# Altium PCB Copy of ESP32_SENSORS_BATTERY_1.PcbDoc
Units mm, origin at the board's own origin, x right, y up, seen from the top; angles counter-clockwise.
Board outline 54 x 48.94 mm, 2 copper layers (Top Layer, Bottom Layer); 31 components, 23 nets, 129 pads, 0 vias.
Unrouted connection lines stored in the file: 71.
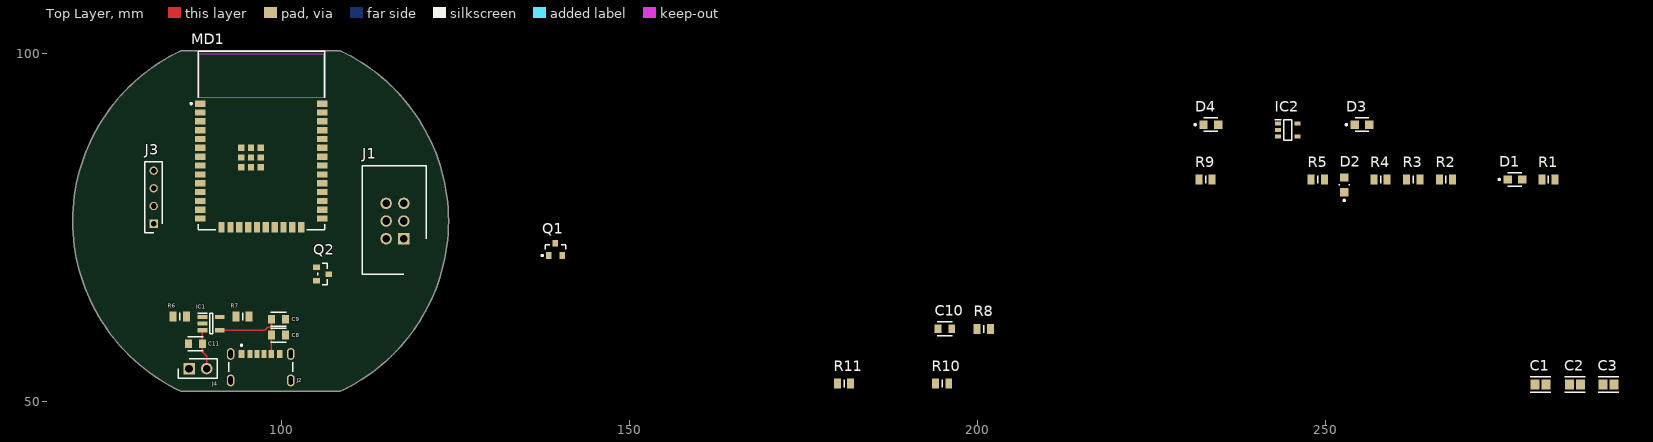
[diagram p0: Top Layer view]
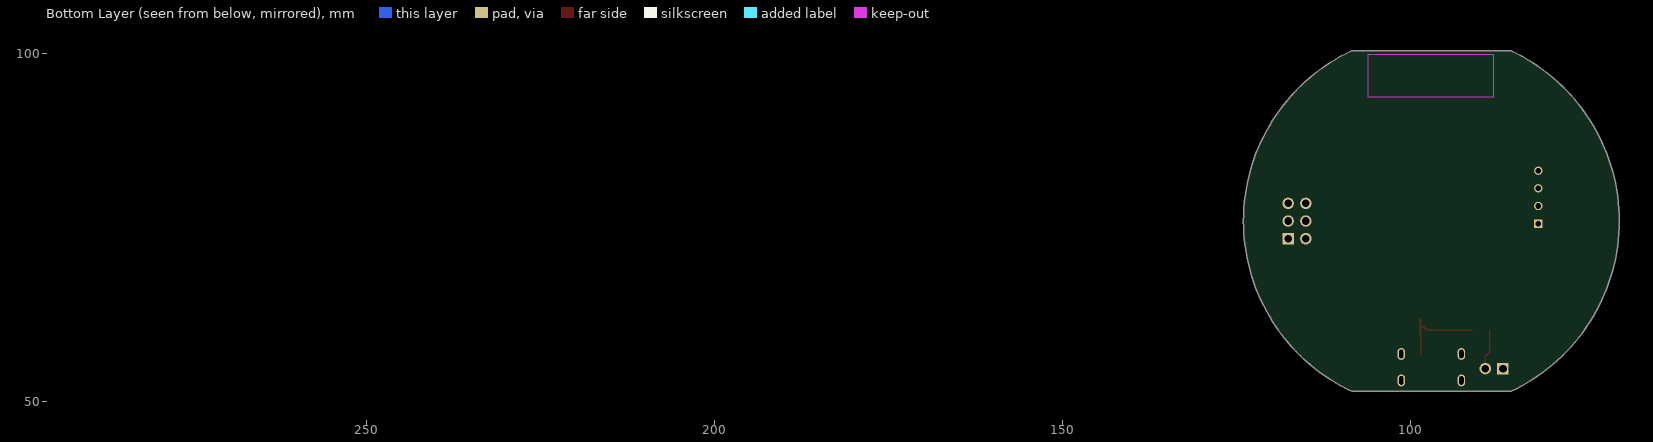
[diagram p1: Bottom Layer view, seen from below]

## Layer stack, top to bottom
Top Solder: solder mask 0.0102, Solder Resist, Dk 3.5
Top Layer: signal copper 0.0356
Dielectric 1: dielectric 0.32, FR-4, Dk 4.8
Bottom Layer: signal copper 0.0356
Bottom Solder: solder mask 0.0102, Solder Resist, Dk 3.5

## Board outline
85.614,51.477 108.442,51.477 ccw(c97.028,75.946) 108.442,100.415 85.614,100.415 ccw(c97.028,75.946)

## Design rules (kind name [scope] priority, off if disabled: settings)
Clearance [All] p1: gap=0.254 ignorepadtopadclearanceinfootprint=FALSE
PolygonConnect [All] p1: connectstyle=Relief reliefconductorwidth=0.254 reliefentries=4 polygonreliefangle="90 Angle" airgapwidth=0.254
RoutingVias [All] p1: holewidth=0.711 width=1.27 viastyle="Through Hole" minholewidth=0.711 minwidth=1.27 maxholewidth=0.711 maxwidth=1.27
SolderMaskExpansion [All] p1: expansion=0.102 istentingtop=FALSE
SupplyNets "Schematic Supply Nets_3" [InNet('5V')] p1: voltage=0.000
SupplyNets "Schematic Supply Nets_2" [InNet('GND')] p2: voltage=0.000
SupplyNets "Schematic Supply Nets_1" [InNet('3.3V')] p3: voltage=0.000
SupplyNets "Schematic Supply Nets" [InNet('BAT +')] p4: voltage=0.000
Width [All] p1: maxlimit=0.254 minlimit=0.254 preferedwidth=0.254
30 further rules are at their usual default settings.

## Classes and differential pairs
component class U_Power: C8 C9 C10 C11 D3 D4 IC1 IC2 R6 R7 R8
component class ESP32: C1 C2 C3 D1 D2 J1 J2 J3 J4 MD1 Q1 Q2 R1 R2 R3 R4 R5 R9 R10 R11

## Components (designator, comment, footprint, x,y, rotation, side; value= is the part's Value field where it differs from the comment)
C1 "10uF" FP-0805-L_2_01_0_2-W_1_25-IPC_B 280.924,52.451 r0 top
C2 "10uF" FP-0805-L_2_01_0_2-W_1_25-IPC_B 285.877,52.451 r0 top
C3 "100nF" FP-0805-L_2_01_0_2-W_1_25-IPC_B 290.703,52.451 r0 top
C8 "100nF" FP-0805-L_2_01_0_2-W_1_25-MFG 99.568,59.563 r0 top
C9 "100nF" FP-0805-L_2_01_0_2-W_1_25-MFG 99.584,61.849 r0 top
C10 "100nF" FP-0805-L_2_01_0_2-W_1_25-MFG 195.326,60.452 r0 top
C11 "100nF" FP-0805-L_2_01_0_2-W_1_25-MFG 87.646,58.293 r180 top
D1 "LS R976-NR-1 LED RED" FP-LS_R976-MFG 277.241,81.915 r0 top
D2 "LO R976-PS-1 LED ORANGE" FP-LO_R976-MFG 252.73,81.153 r90 top
D3 "LS R976-NR-1 LED RED" FP-LS_R976-MFG 255.27,89.789 r0 top
D4 "LS R976-NR-1 LED RED" FP-LS_R976-MFG 233.553,89.789 r0 top
IC1 "MCP73831T-2ATI_OT" SOT95P270X145-5N 89.916,61.214 r0 top
IC2 "XC6210B332MR-G" SOT95P280X130-5N 244.602,89.027 r0 top
J1 "T821106A1S100CEU" SHDR6W64P254X254_2X3_1524X895X915P 117.602,73.406 r90 top
J2 "USB4125-GF-A-0190" FP-USB4125-GF-A-0190-MFG 97.028,53.848 r0 top
J3 "DS1023-1_4S21" RHDR4W60P0X254_1X4_1016X250X840P 81.661,75.565 r90 top
J4 "DS1021-1_2SF11-B" HDRV2W64P0X254_1X2_508X254X588P 86.741,54.737 r0 top
MD1 "ESP32-WROOM-32E (4MB)" FP-ESP32-WROOM-32E_4MB-MFG 97.128,87.547 r0 top
Q1 "IRLML2502TRPBF" INTR-SOT-23-3_V 139.385,71.878 r0 top
Q2 "IRLML6402TRPBF" FP-Micro3-MFG 105.922,68.326 r0 top
R1 "10k" RESC2013X65N 282.067,81.915 r0 top
R2 "10k / NC" RESC2013X65N 267.335,81.915 r0 top
R3 "1k" RESC2013X65N 262.636,81.915 r0 top
R4 "10k" RESC2013X65N 257.937,81.915 r0 top
R5 "1k" RESC2013X65N 248.92,81.915 r0 top
R6 "10k" RESC2013X65N 85.41,62.23 r0 top
R7 "2k" RESC2013X65N 94.427,62.23 r180 top
R8 "1k" RESC2013X65N 200.914,60.452 r0 top
R9 "100k" RESC2013X65N 232.791,81.915 r0 top
R10 "100k" RESC2013X65N 194.945,52.578 r0 top
R11 "100k" RESC2013X65N 180.848,52.578 r0 top

## Footprints (in the part's own frame and the unit in brackets; to place one, negate y for a bottom-side part, rotate by r counter-clockwise, add the part's x,y. Pads: shape width x height; smd on the part's side, far side on the other; paste and mask are expansions set on the pad)
FP-0805-L_2_01_0_2-W_1_25-IPC_B [mm]
  rect 1.305x1.456 smd paste+0 mask+0: 1(-0.806,0) 2(0.806,0)
  silkscreen extent -1.46,-1.13 1.46,1.13, body extent -1.71,-0.98 1.71,0.98, height 0.25
FP-0805-L_2_01_0_2-W_1_25-MFG [mm]
  rect 1x1.25 smd paste+0 mask+0: 1(-1,0) 2(1,0)
  silkscreen extent -1.1,-1 1.1,1, body extent -1.6,-0.82 1.6,0.82, height 0.25
FP-ESP32-WROOM-32E_4MB-MFG [mm]
  rect 1.5x0.9 smd paste+0 mask+0: 1(-8.75,5.26) 2(-8.75,3.99) 3(-8.75,2.72) 4(-8.75,1.45) 5(-8.75,0.18) 6(-8.75,-1.09) 7(-8.75,-2.36) 8(-8.75,-3.63) 9(-8.75,-4.9) 10(-8.75,-6.17) 11(-8.75,-7.44) 12(-8.75,-8.71) 13(-8.75,-9.98) 14(-8.75,-11.25) 25(8.75,-11.25) 26(8.75,-9.98) 27(8.75,-8.71) 28(8.75,-7.44) 29(8.75,-6.17) 30(8.75,-4.9) 31(8.75,-3.63) 32(8.75,-2.36) 33(8.75,-1.09) 34(8.75,0.18) 35(8.75,1.45) 36(8.75,2.72) 37(8.75,3.99) 38(8.75,5.26)
  rect 0.9x1.5 smd paste+0 mask+0: 15(-5.71,-12.5) 16(-4.44,-12.5) 17(-3.17,-12.5) 18(-1.9,-12.5) 19(-0.63,-12.5) 20(0.64,-12.5) 21(1.91,-12.5) 22(3.18,-12.5) 23(4.45,-12.5) 24(5.72,-12.5)
  rect 0.9x0.9 smd paste+0 mask+0: 39(-2.9,-3.86) 39(-2.9,-2.46) 39(-2.9,-1.06) 39(-1.5,-3.86) 39(-1.5,-2.46) 39(-1.5,-1.06) 39(-0.1,-3.86) 39(-0.1,-2.46) 39(-0.1,-1.06)
  Keep-Out Layer region: -9,6.205 9,6.205 9,12.395 -9,12.395
  Keep-Out Layer region: -9,6.205 9,6.205 9,12.395 -9,12.395
  silkscreen extent -10.2,-12.83 9.08,12.83, body extent -9.6,-13.35 9.6,12.93, height 0.25
FP-LO_R976-MFG [mm]
  rect 1.2x1.2 smd paste+0 mask+0: 1(-1.05,0) 2(1.05,0)
  silkscreen extent -2.37,-0.7 0.08,0.7, body extent -1.75,-0.8 1.75,0.8, height 0.25
FP-LS_R976-MFG [mm]
  rect 1.2x1.2 smd paste+0 mask+0: 1(-1.05,0) 2(1.05,0)
  silkscreen extent -2.37,-0.97 1,0.97, body extent -1.75,-0.8 1.75,0.8, height 0.25
FP-Micro3-MFG [mm]
  rect 0.972x0.802 smd paste+0 mask+0: 1(-0.885,0.95) 2(-0.885,-0.95) 3(0.885,0)
  silkscreen extent -0.7,-1.52 0.7,1.52, body extent -1.47,-1.87 1.47,1.87, height 0.25
FP-USB4125-GF-A-0190-MFG [mm]
  rrect100% 1.1x1.7 hole 1.2 slot 0.6 at 0 deg paste-2539.97 mask+0: 1(-4.32,3) 2(4.32,3) 3(-4.32,-0.8) 4(4.32,-0.8)
  rect 0.7x1.2 smd paste+0 mask+0: A5(-0.5,3) B5(0.5,3)
  rect 0.76x1.2 smd paste+0 mask+0: A9(1.52,3) B9(-1.52,3)
  rect 0.8x1.2 smd paste+0 mask+0: A12(2.75,3) B12(-2.75,3)
  silkscreen extent -4.59,0.43 4.59,4.37, body extent -4.97,-3.57 4.97,3.95, height 0.25
HDRV2W64P0X254_1X2_508X254X588P [mm]
  rect 1.65x1.65 hole 1.1: 1(0,0)
  round 1.65 hole 1.1: 2(2.54,0)
  silkscreen extent -1.52,-1.4 4.06,1.4, body extent -1.27,-1.27 3.81,1.27, height 8.61
INTR-SOT-23-3_V [mm] "SOT23, 3-Leads, Body 2.92x1.3mm, Pitch 1.9mm"
  rect 0.802x0.972 smd: 1(-0.95,-0.885) 2(0.95,-0.885) 3(0,0.885)
  silkscreen extent -2.03,-1.01 1.46,0.64, body extent -1.46,-0.65 1.46,0.65, height 1.12
RESC2013X65N [mm]
  rect 1x1.45 smd: 1(-0.95,0) 2(0.95,0)
  silkscreen extent 0,-0.54 0,0.54, body extent -1,-0.64 1,0.64, height 0.65
RHDR4W60P0X254_1X4_1016X250X840P [mm]
  rect 1.2x1.2 hole 0.8: 1(0,0)
  round 1.2 hole 0.8: 2(2.54,0) 3(5.08,0) 4(7.62,0)
  silkscreen extent -1.27,-1.25 8.89,1.25, body extent -1.27,-1.25 8.89,1.25, height 8.4
SHDR6W64P254X254_2X3_1524X895X915P [mm]
  rect 1.65x1.65 hole 1.1: 1(0,0)
  round 1.65 hole 1.1: 2(0,2.54) 3(2.54,0) 4(2.54,2.54) 5(5.08,0) 6(5.08,2.54)
  silkscreen extent -5.08,-3.2 10.46,5.94, body extent -5.08,-3.2 10.16,5.74, height 9.15
SOT95P270X145-5N [mm]
  rect 1.4x0.6 smd: 1(-1.25,0.95) 2(-1.25,0) 3(-1.25,-0.95) 4(1.25,-0.95) 5(1.25,0.95)
  silkscreen extent -1.95,-1.45 0.2,1.5, body extent -1.35,-1.45 1.35,1.45, height 1.45
SOT95P280X130-5N [mm]
  rect 0.9x0.6 smd: 1(-1.4,0.95) 2(-1.4,0) 3(-1.4,-0.95) 4(1.4,-0.95) 5(1.4,0.95)
  silkscreen extent -1.85,-1.45 0.6,1.5, body extent -1.4,-1.45 1.4,1.45, height 1.3

## Part data
C1 C2 C3: library part CMP-04427-003009-1, "Automotive Ceramic Capacitor, 0805, 22nF, 5%, X7R, 15%, 100V", Capacitance=22nF, Case Code (Imperial)=0805, Case Code (Metric)=2012, Dielectric=X7R, Max Operating Temperature=125°C, Min Operating Temperature=-55°C, Package Quantity=4000, Ratings=AEC-Q200, Tolerance=5%, Voltage Rating=100V, Case/Package=0805, Construction=Flat, Depth=1.25mm, Dissipation Factor=2.5%, Height=0.94mm, Lead Free="Lead Free", Length=2.01mm, Mount="Surface Mount", Number of Pins=2, Packaging="Tape and Reel", Radiation Hardening=No, RoHS Compliant=Yes, Series=-, Termination=SMD/SMT, Thickness=0.037inch, Voltage Rating (DC)=100V, Width=0.049inch
C8 C9 C10 C11: library part CMP-2007-04762-2, "Automotive Ceramic Capacitor, 0805, 100nF, 5%, X7R, 15%, 100V", Case Code (Imperial)=0805, Case Code (Metric)=2012, Dielectric=X7R, Max Operating Temperature=125°C, Min Operating Temperature=-55°C, Package Quantity=2000, Ratings=AEC-Q200, Tolerance=5%, Voltage Rating=100V, Capacitance=100nF, Case/Package=0805, Construction=Flat, Depth=1.25mm, Height=1.4mm, Lead Free="Lead Free", Length=2.01mm, Mount="Surface Mount", Number of Pins=2, Packaging="Tape and Reel", RoHS Compliant=Yes, Series=-, Termination=SMD/SMT, Thickness=0.055inch, Voltage Rating (DC)=100V, Weight=0.000194oz, Width=0.049inch
D1 D3 D4: library part CMP-62016-000037-1, "LED RED DIFFUSED 0805 SMD", Case Code (Imperial)=0805, Case Code (Metric)=2012, Color=Red, Forward Current=25mA, Forward Voltage=2.5V, Lens Color=White, Max Operating Temperature=85°C, Min Operating Temperature=-30°C, Package Quantity=16000, Power Dissipation=65W, Reverse Voltage=12V, Test Current=20mA, Case/Package=0805, Depth=1.35mm, Dominant Wavelength=633nm, Height=0.9mm, Illumination Color=Red, Length=2mm, Lens Size=1.25mm, Lens Style=Flat, Lens Transparency=Diffused, Luminous Flux=0.47lm, Luminous Intensity=180mcd, Mount="Surface Mount", Number of Elements=1, Number of LEDs=1, Number of Pins=2, Packaging="Tape and Reel", Radiation Hardening=No, Viewing Angle=160°, Width=1.25mm
D2: library part CMP-62016-000030-1, "LED ORANGE DIFFUSED 0805 SMD", Case Code (Imperial)=0805, Case Code (Metric)=2012, Color=Orange, Forward Current=25mA, Forward Voltage=2V, Lens Color=White, Max Operating Temperature=85°C, Min Operating Temperature=-30°C, Package Quantity=16000, Reverse Voltage=12V, Test Current=20mA, Case/Package=0805, Contact Plating=Tin, Dominant Wavelength=606nm, Height=0.9mm, Illumination Color=Orange, Length=2mm, Lens Size=1.25mm, Lens Style=Flat, Lens Transparency=Diffused, Luminous Flux=0.735lm, Luminous Intensity=162.5mcd, Mount="Surface Mount", Number of LEDs=1, Number of Pins=2, Packaging="Tape and Reel", Radiation Hardening=No, Viewing Angle=160°, Width=1.25mm
IC1: "Integrated Circuit", Arrow Part Number=MCP73831T-2ATI/OT, Manufacturer_Name=Microchip, Mouser Part Number=579-MCP73831T-2ATIOT, Arrow Price/Stock=https://www.arrow.com/en/products/mcp73831t-2atiot/microchip-technology?utm_currency=USD&region=nac, Datasheet Link=https://datasheet.datasheetarchive.com/originals/distributors/Datasheets-DGA15/727147.pdf, Height=1.45mm, Manufacturer_Part_Number=MCP73831T-2ATI/OT, Mouser Price/Stock=https://www.mouser.co.uk/ProductDetail/Microchip-Technology/MCP73831T-2ATI-OT?qs=yUQqVecv4qsZbioEUu%252B83g%3D%3D
IC2: "Integrated Circuit", Manufacturer_Name=Torex, Mouser Part Number=865-XC6210B332MR-G, Datasheet Link=https://www.torexsemi.com/file/xc6210/XC6210.pdf, Height=1.3mm, Manufacturer_Part_Number=XC6210B332MR-G, Mouser Price/Stock=https://www.mouser.co.uk/ProductDetail/Torex-Semiconductor/XC6210B332MR-G?qs=AsjdqWjXhJ%2FS4LOuBYdYHQ%3D%3D
J1: "Connector", Manufacturer_Name=Amphenol, Mouser Part Number=N/A, Arrow Part Number=T821106A1S100CEU, Arrow Price/Stock=https://www.arrow.com/en/products/t821106a1s100ceu/amphenol?region=europe, Height=9.15mm, Manufacturer_Part_Number=T821106A1S100CEU, Mouser Price/Stock=https://www.mouser.co.uk/ProductDetail/Amphenol/T821106A1S100CEU?qs=%252BRAvXJslkuCjsmzKMnqFCQ%3D%3D
J2: library part CMP-245163-000004-1, "CONN RCPT TYPE C 6P SMD RA"
J3: "Connector", Manufacturer_Name=Connfly, Manufacturer_Part_Number=DS1023-1*4S21, Datasheet Link=https://www.tme.eu/Document/951e887d7e645db1a4e49e0834499c9b/zl262-sg.pdf, Height=8.4mm
J4: "Connector", Manufacturer_Name=Connfly, Manufacturer_Part_Number=DS1021-1*2SF11-B, Datasheet Link=https://www.tme.com/Document/cc301e58a5da78cb543a94b5a5b7f06a/DS1021.pdf, Height=5.88mm
MD1: library part CMP-194065-000026-1, "RX TXRX MOD WIFI TRACE ANT SMD"
Q1: library part CMP-2000-04985-1, "N-Channel HEXFET(R) Power MOSFET, 20 V VDS, +/- 12 V VGS, 4.2 A, 3-Pin SOT23, RoHS, Tape and Reel", Drain-Source On Resistance-Max=0.045O, Drain-to-Source Voltage [Vdss]=20V, Manufacturer="International Rectifier", Package Description="3-Pin Small Outline Transistor, Body 2.92 x 1.3 mm, Pitch 0.95 mm", Package Reference=SOT-23-3, Rated Power Dissipation=1.25W, Channel Type=N-Channel, Datasheet URL=https://datasheet.ciiva.com/6383/irlml2502pbf-6383216.pdf, Datasheet Version=Apr-14, Manufacturer URL=http://internationalrectifier.com/, Qg Gate Charge=8nC
Q2: library part CMP-32901-000130-1, "MOSFET P-CH 20V 3.7A SOT-23", Continuous Drain Current=-3.7A, Drain To Source Breakdown Voltage=-20V, Drain To Source Resistance=0.05Ω, Gate To Source Voltage=12V, Input Capacitace At Vds="633pF @ -10V", Manufacturer=Infineon, Max Forward Diode Voltage=-1.2V, Max Junction Temp=+150°C, Package=Micro3, Power Dissipation=1.3W, Pulse Drain Current=-22A, Temperature="-55°C to +150°C", Temperature Range Low=-55°C, Automotive=No, Category=Trans, ComponentLink2Description=Datasheet, ComponentLink2URL=https://www.infineon.com/dgdl/irlml6402pbf.pdf?fileId=5546d462533600a401535668d5c2263c, Depletion Mode=False, Device Class L1="Discrete Semiconductors", Device Class L2=Transistors, Device Class L3=MOSFETs, Digikey Description="MOSFET P-CH 20V 3.7A SOT-23", Drain To Source Voltage=-20V, Footprint Url=http://irf.com/package/outline/po_micro3.pdf, Gate Charge At Vgs="8nC @ -5V", Height=1.12mm, Ipc Land Pattern Name=SOT95P237X100-3, Lead Free=Yes, Manufacturer Part Number=IRLML6402TRPBF, Number Of Channels=1, Number Of P Channels=1, Octopart=https://octopart.com/irlml6402trpbf-infineon-65874989, Reverse Recovery Charge=11nC, Reverse Recovery Time=29ns, RoHS=TRUE, Rthja Max=75°C/W, Standoff Height=0.01mm, Technology=MOSFET, Temperature Range High=+150°C, Threshold Vgs=-0.55V, Threshold Vgs Max=-1.2V, Threshold Vgs Min=-0.4V, Turn Off Delay Time=588ns, Turn On Delay Time=350ns
R1 R2 R3 R4 R5 R6 R7 R8 R9 R10 R11: library part 0805W8F1000T5E, "Resistor", Manufacturer_Name="UNI-ROYAL(Uniroyal Elec)", Datasheet Link=https://datasheet.lcsc.com/szlcsc/Uniroyal-Elec-0805W8F1000T5E_C17408.pdf, Height=0.65mm, Manufacturer_Part_Number=0805W8F1000T5E

## Nets (pads, with @x,y where several pads share a name; then routed paths per layer and width w, separated by ;. In a path a pad name is that pad's centre, name@x,y a point inside that pad or via, vN(x,y) a via of type N, cw(c..) or ccw(c..) an arc to the next point about the centre after c; other vN are vias at no path point)
3.3V: C1.1 C2.1 C3.1 C10.1 D1.2 D2.2 D4.2 IC2.5 J1.1 J3.4 MD1.2 R1.2 R2.2 R4.2
5V: C8.1 C9.1 D3.2 IC1.4 IC2.1 IC2.3 J2.A9 J2.B9 | length 12.6
  Top Layer w0.254: IC1.4 97.602,60.264 98.036,60.698 98.568,60.698 ; J2.A9 98.548,59.543 C8.1 98.568,60.698 ; C9.1 98.568,61.833 98.568,60.698
"BAT +": C11.1 IC1.3 J4.2 Q2.2 R11.1 | length 5.8
  Top Layer w0.254: IC1.3 88.646,60.244 C11.1 88.646,57.15 89.281,56.515 J4.2
BAT-ADC: MD1.6 R9.1 R10.2
BAT-ADC-EN: MD1.26 Q1.1
GND: C1.2 C2.2 C3.2 C8.2 C9.2 C10.2 C11.2 IC1.2 IC2.2 J1.3 J2.A12 J2.B12 J3.3 J4.1 MD1.1 MD1.15 MD1.38 MD1.39 Q1.2 R7.1 R8.1 R9.2
LED-ORANGE: MD1.9 R5.1
LED-RED: MD1.8 R3.1
NetD1_1: D1.1 R3.2
NetD2_1: D2.1 R5.2
NetD3_1: D3.1 R6.2
NetD4_1: D4.1 R8.2
NetIC1_1: IC1.1 R6.1
NetIC1_5: IC1.5 R7.2
NetJ1_2: J1.2 MD1.34
NetJ1_4: J1.4 MD1.3 R4.1
NetJ1_5: J1.5 MD1.25 R1.1
NetJ1_6: J1.6 MD1.35
NetJ3_1: J3.1 MD1.28
NetJ3_2: J3.2 MD1.27
NetMD1_24: MD1.24 R2.1
NetQ1_3: Q1.3 Q2.1 R11.2
NetQ2_3: Q2.3 R10.1
pads on no net: IC2.4 J2.1 J2.2 J2.3 J2.4 J2.A5 J2.B5 MD1.4 MD1.5 MD1.7 MD1.10 MD1.11 MD1.12 MD1.13 MD1.14 MD1.16 MD1.17 MD1.18 MD1.19 MD1.20 MD1.21 MD1.22 MD1.23 MD1.29 MD1.30 MD1.31 MD1.32 MD1.33 MD1.36 MD1.37

## Silkscreen, mask and mechanical layers (free items; w line width, h text height)
Mechanical 1:
  lines w0.254: 61.849,75.946 97.028,75.946 ; 97.028,51.477 97.028,75.946 ; 97.028,100.415 97.028,75.946 ; 131.191,75.946 97.028,75.946 ; 85.614,51.477 cw(c97.028,75.946) 85.614,100.415 108.442,100.415 cw(c97.028,75.946) 108.442,51.477 85.614,51.477